# EAGLE board ACS722_Low_Current_Sensor (EAGLE 7.2.0)
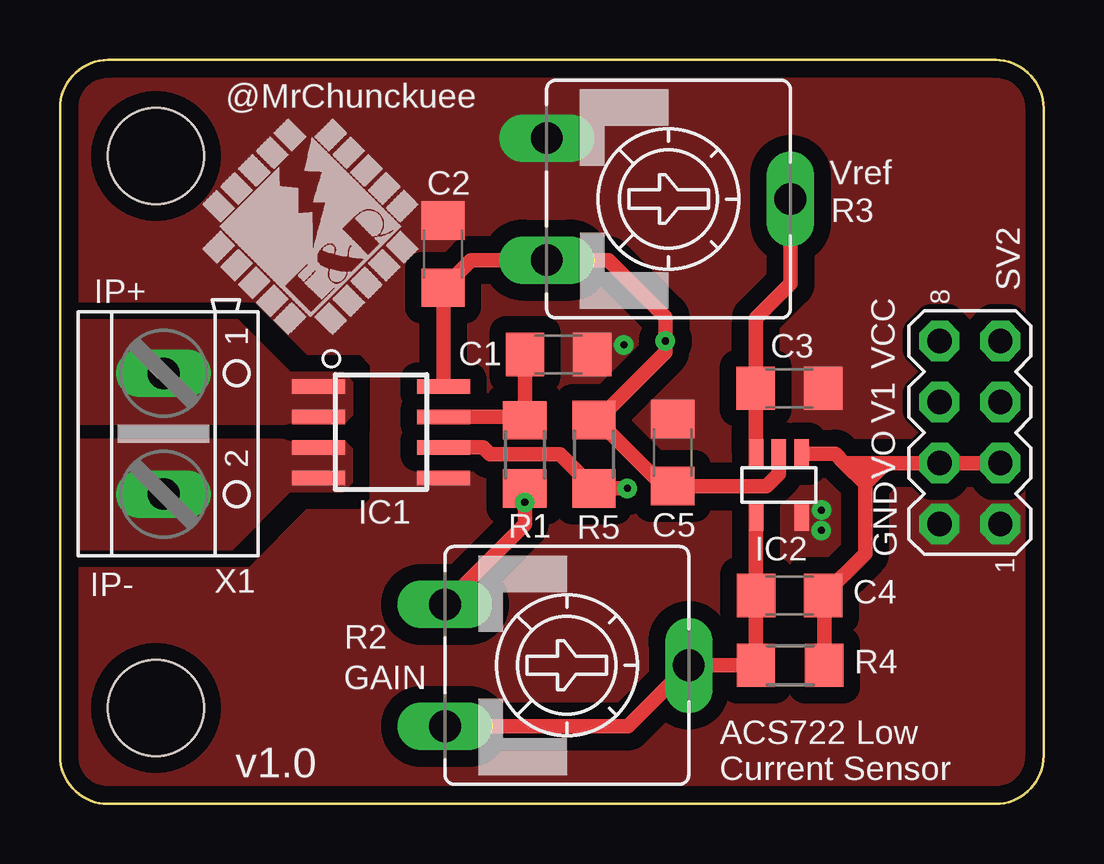
[diagram p0: board, top side]
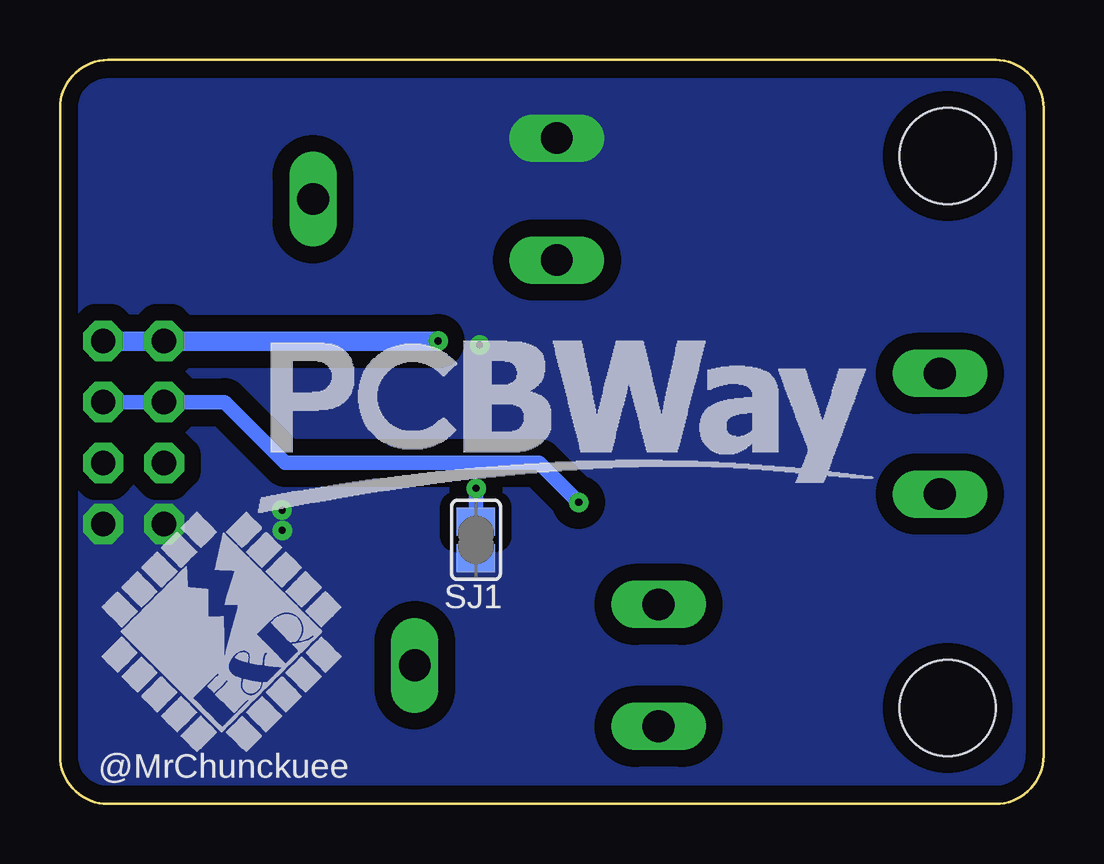
[diagram p1: board, bottom side, seen from below]

Size 41 x 31 mm. Coordinates in mm from the lower left corner, seen from the top.
Outline: 39,31 2,31 arc90 0,29 0,2 arc90 2,0 39,0 arc90 41,2 41,29 arc90 39,31
Copper layers (1*16): Top 0.035mm / dielectric 1.5mm / Bottom 0.035mm
Design rules "SparkFun-2-layer-STANDARD": minimum track width 10mil, minimum drill 20mil, track to track 10mil, track to pad 8mil, pad to pad 8mil, via to via 10mil, smd to smd 8mil, copper to edge 8mil, drill to drill 8mil, minimum pad ring 10mil, minimum via ring 10mil, stop-mask expansion 4mil, vias tented up to drill 25mil, thermal gap 10mil
Net classes: 1 8_mil: width 0.203 mm; 2 10_mil: width 0.254 mm; 3 12_mil: width 0.305 mm; 4 15_mil: width 0.381 mm; 5 20_mil: width 0.508 mm; 6 25_mil: width 0.635 mm; 7 30_mil: width 0.762 mm
Holes 4 mm at 4,27 4,4

## Footprints (pad centres in the part's own frame; a part is rotated, then mirrored left to right if it is on the bottom)
C1206 = smd 1.6 x 1.8: 1 -1.4,0; 2 1.4,0
SO-08 = smd 2.2 x 0.6: 1 -2.6,1.905; 2 -2.6,0.635; 3 -2.6,-0.635; 4 -2.6,-1.905; 5 2.6,-1.905; 6 2.6,-0.635; 7 2.6,0.635; 8 2.6,1.905
SOT23-5 = smd 0.6 x 1.2: 1 -0.95,-1.306; 2 0,-1.306; 3 0.95,-1.306; 4 0.95,1.306; 5 -0.95,1.306
R1206 = smd 1.6 x 1.803: 1 -1.422,0; 2 1.422,0
CA9V = drill 1.321 long: A -2.54,-5.08; E 2.54,-5.08; S 0,5.08
SJ = smd 1.168 x 1.6: 1 -0.762,0; 2 0.762,0
MA04-2 = drill 1.016 pad 1.676 octagon: 1 -3.81,-1.27; 2 -3.81,1.27; 3 -1.27,-1.27; 4 -1.27,1.27; 5 1.27,-1.27; 6 1.27,1.27; 7 3.81,-1.27; 8 3.81,1.27
AK500/2 = drill 1.321 long: 1 -2.515,0; 2 2.515,0

## Placement (x,y rotation side)
C1  1nF  [C1206]  20.78,18.73 0 top
C2  0.1uF  [C1206]  15.97,22.91 270 top
C3  0.1uF  [C1206]  30.41,17.33 0 top
C4  100pF  [C1206]  30.42,8.69 0 top
C5  0.1uF  [C1206]  25.55,14.64 90 top
IC1  ACS722LLCTR  [SO-08]  13.39,15.5 0 top
IC2  MCP6001R  [SOT23-5]  29.96,13.29 180 top
R1  1k  [R1206]  19.38,14.57 90 top
R2  10K  [CA9V]  21.13,5.78 270 top
R3  10K  [CA9V]  25.37,25.21 270 top
R4  22k  [R1206]  30.43,5.78 180 top
R5  4.7k  [R1206]  22.26,14.57 90 top
SJ1  [SJ]  23.66,11.01 90 bottom
SV2  [MA04-2]  37.93,15.48 90 top
X1  [AK500/2]  4.32,15.43 270 top

## Library data of the parts
C1-C5 R1 R4 R5 = rcl
IC1 = ALFATEK_Sensores
IC2 = ALFATEK_CircuitosIntegrados
R2 R3 = pot
SJ1 = ALFATEK_Conectores
SV2 = EYR_Conectores; OC_FARNELL: unknown; OC_NEWARK: unknown
X1 = con-ptr500; OC_FARNELL: unknown; OC_NEWARK: unknown

## Nets
BW_SEL: IC1.6 R5.1 SJ1.2
GND: C1.2 C2.1 C3.2 C5.2 IC1.5 IC2.5 R3.A SJ1.1 SV2.1 SV2.2
IP+: IC1.1 IC1.2 X1.1
IP-: IC1.3 IC1.4 X1.2
N$5: C4.1 IC2.4 R2.E R2.S R4.2
N$6: C3.1 IC2.3 R3.S
V1: R1.1 R2.A SV2.5 SV2.6
VCC: C2.2 C5.1 IC1.8 IC2.2 R3.E R5.2 SV2.7 SV2.8
VIOUT: C1.1 IC1.7 R1.2
VO: C4.2 IC2.1 R4.1 SV2.3 SV2.4

## Tracks (layer width: path | path; a pad name or v marks a point on that pad's centre or on a via)
BW_SEL  (via drill 0.3 pad 0.81)
  Top 0.406: R5.1
  Top 0.61: R5.1 20.85,14.57 17.94,14.57 17.64,14.86 IC1.6 | R5.1 v23.66,13.16
  Bottom 0.406: SJ1.2
  Bottom 0.61: SJ1.2 v23.66,13.16
GND  (via drill 0.3 pad 0.81)
  other vias: 23.51,19.13 31.74,11.4 31.74,12.24
  pour Top (isolate 0.7, rank 2, no thermals): -1,32 42,32 42,-1 -1,-1
  pour Bottom (isolate 0.7, rank 2, no thermals): -1,32 42,32 42,-1 -1,-1
IP+
  pour Top (isolate 0.7, no thermals): 11.8,15.8 -0.2,15.8 -0.2,20.2 7.4,20.2 9.6,18 11.8,18 12.2,17.6 12.2,16.2
IP-
  pour Top (isolate 0.7, no thermals): 11.8,15.2 -0.2,15.2 -0.2,10.6 7.2,10.6 9.6,13 11.8,13 12.2,13.4 12.2,14.8
N$5
  Top 0.61: R2.E 23.67,3.24 R2.S R4.2 C4.1 IC2.4
N$6
  Top 0.61: IC2.3 C3.1 29.01,20.24 30.45,21.68 R3.S
V1  (via drill 0.3 pad 0.81)
  Top 0.61: R1.1 v19.38,12.57 19.38,11.65 R2.A
  Bottom 0.61: SV2.5 SV2.6 34.14,16.75 31.61,14.22 21.02,14.22 v19.38,12.57
VCC  (via drill 0.3 pad 0.81)
  Top 0.61: 16.23,21.42 C2.2 | R5.2 22.41,16 | 22.41,16 25.16,13.24 C5.1 29.44,13.24 29.96,13.77 IC2.2 | C2.2 17.13,22.67 R3.E 22.86,22.67 25.24,20.28 v25.24,19.29 25.24,18.82 22.41,16 | IC1.8 15.99,21.5 C2.2
  Bottom 0.813: SV2.7 SV2.8 v25.24,19.29
VIOUT
  Top 0.61: C1.1 R1.2 19.24,16.13 IC1.7
VO
  Top 0.61: R4.1 31.86,8.65 C4.2 33.56,10.44 33.56,14.09 33.45,14.21 | SV2.3 SV2.4 33.45,14.21 | 34.42,14.21 33.56,13.35 32.71,14.21 | IC2.1 32.32,14.6 32.71,14.21 | 33.45,14.21 32.71,14.21

## Text on the board
tPlace: @MrChunckuee | Vref | IP+ | VCC | V1 | VO | GND | IP- | GAIN | ACS722 Low | v1.0 | Current Sensor
bPlace: @MrChunckuee